# EAGLE board AD9833_FG_Main (EAGLE 7.2.0)

Size 159.69 x 80 mm. Coordinates in mm from the lower left corner, seen from the top.
Outline: 59.69,0 159.69,0 159.69,80 59.69,80 59.69,0
Copper layers (1*16): Top 0.035mm / dielectric 1.5mm / Bottom 0.035mm
Design rules "default": minimum track width 10mil, minimum drill 24mil, track to track 8mil, track to pad 8mil, pad to pad 8mil, via to via 8mil, smd to smd 8mil, copper to edge 40mil, drill to drill 8mil, minimum pad ring 10mil, minimum via ring 8mil, stop-mask expansion 4mil, vias tented up to drill 0mil, thermal gap 10mil

## Footprints (pad centres in the part's own frame; a part is rotated, then mirrored left to right if it is on the bottom)
C050-024X044 = drill 0.813 octagon: 1 -2.54,0; 2 2.54,0
C025-024X044 = drill 0.813 octagon: 1 -1.27,0; 2 1.27,0
SANYO-OSCON_C = drill 0.8 pad 1.27: + 1.25,0; - -1.25,0
E2,5-6 = drill 0.813 pad 1.6: + -1.27,0 | drill 0.813 pad 1.6 octagon: - 1.27,0
DIL28-3 = drill 0.813 long: 1 -15.24,-3.81; 2 -12.7,-3.81; 3 -10.16,-3.81; 4 -7.62,-3.81; 5 -5.08,-3.81; 6 -2.54,-3.81; 7 0,-3.81; 8 2.54,-3.81; 9 5.08,-3.81; 10 7.62,-3.81; 11 10.16,-3.81; 12 12.7,-3.81; 13 15.24,-3.81; 14 17.78,-3.81; 15 17.78,3.81; 16 15.24,3.81; 17 12.7,3.81; 18 10.16,3.81; 19 7.62,3.81; 20 5.08,3.81; 21 2.54,3.81; 22 0,3.81; 23 -2.54,3.81; 24 -5.08,3.81; 25 -7.62,3.81; 26 -10.16,3.81; 27 -12.7,3.81; 28 -15.24,3.81
AD9833_MODULE = drill 0.8: P$1 -10.16,-2.54; P$2 -7.62,-2.54; P$3 -5.08,-2.54; P$4 -2.54,-2.54; P$5 0,-2.54; P$6 2.54,-2.54; P$7 5.08,-2.54
TO220-4H = drill 1.118 long: 1 -3.81,-12.7; 2 -1.27,-12.7; 3 1.27,-12.7; 4 3.81,-12.7
TO226AA = drill 0.813 octagon: 1 -2.544,0; 2 0.001,0; 3 2.524,-0.04
1X03 = drill 1.016 long: 1 -2.54,0; 2 0,0; 3 2.54,0
1X02 = drill 1.016 long: 1 -1.27,0; 2 1.27,0
ATD_SPLC792-I2C = drill 0.8: P$1 -8.89,5.08; P$2 -6.35,5.08; P$3 -3.81,5.08; P$4 -1.27,5.08; P$5 1.27,5.08; P$6 3.81,5.08; P$7 6.35,5.08; P$8 8.89,5.08; P$9 11.43,5.08
LED3MM = drill 0.813 octagon: A -1.27,0; K 1.27,0
HC49/S = drill 0.813: 1 -2.413,0; 2 2.413,0
0207/7 = drill 0.813 octagon: 1 -3.81,0; 2 3.81,0
W237-132 = drill 1.194 long: 1 -2.54,-0.635; 2 2.54,-0.635

## Placement (x,y rotation side)
C1  22pF  [C050-024X044]  43.18,74.93 0 top
C2  22pF  [C050-024X044]  35.56,74.93 0 top
C3  0.1uF  [C025-024X044]  27.94,74.93 0 top
C4  0.1uF  [C025-024X044]  21.59,74.93 0 top
C5  100uF  [SANYO-OSCON_C]  -12.7,67.31 0 top  (outside the outline)
C6  10uF  [E2,5-6]  12.7,74.93 0 top
C7  0.1uF  [C025-024X044]  -35.56,-24.13 0 top  (outside the outline)
C8  0.1uF  [C025-024X044]  -35.56,-29.21 0 top  (outside the outline)
IC1  ATMEGA48/88/168  [DIL28-3]  26.67,57.15 0 top
IC2  AD9833_MODULE  [AD9833_MODULE]  17.78,35.56 0 top
IC3  NJM2396  [TO220-4H]  38.1,44.45 0 top
IC4  HT7330  [TO226AA]  -5.08,68.58 0 top
JP1  RE  [1X03]  41.91,67.31 0 top
JP2  SW  [1X02]  34.29,67.31 0 top
JP6  TP_GND  [1X02]  -11.43,54.61 0 top  (outside the outline)
LCD1  ATD_SPLC792-I2C  [ATD_SPLC792-I2C]  19.05,21.59 0 top
LED1  GREEN  [LED3MM]  -35.56,-12.7 0 top  (outside the outline)
Q1  16MHz  [HC49/S]  0,55.88 0 top
R1  1k  [0207/7]  3.81,73.66 0 top
R2  12k  [0207/7]  -6.35,73.66 0 top
R3  3.3k  [0207/7]  41.91,80.01 0 top
R4  6.8k  [0207/7]  31.75,80.01 0 top
R5  12k  [0207/7]  21.59,80.01 0 top
R6  1k  [0207/7]  -33.02,-3.81 0 top  (outside the outline)
R7  10k  [0207/7]  -33.02,-19.05 0 top  (outside the outline)
X1  OUT  [W237-132]  -21.59,7.62 0 top  (outside the outline)
X2  PWR  [W237-132]  -33.02,7.62 0 top  (outside the outline)

## Library data of the parts
C1-C8 R1-R7 = rcl
IC1-IC4 LCD1 = mylib2
JP1 JP2 JP6 = pinhead
LED1 = led
Q1 = crystal; OC_FARNELL: 1667008; OC_NEWARK: unknown
X1 X2 = con-wago-508; OC_FARNELL: unknown; OC_NEWARK: unknown

## Nets
+3V3: C6.+ IC4.3 LCD1.P$1
+5V: C4.1 C5.+ C7.2 C8.2 IC1.7 IC1.20 IC2.P$2 IC3.2 IC4.2 R1.2 R6.2 R7.2
GND: C1.1 C2.1 C3.2 C4.2 C5.- C6.- C7.1 C8.1 IC1.8 IC1.22 IC2.P$3 IC3.3 IC4.1 JP1.3 JP2.2 JP6.1 JP6.2 LCD1.P$4 LCD1.P$8 LED1.K R3.1 R5.1 X1.2 X2.2
N$1: IC1.17 IC2.P$4
N$2: IC1.19 IC2.P$5
N$3: IC1.16 IC2.P$6
N$4: IC1.28 LCD1.P$6
N$5: IC1.27 LCD1.P$5
N$6: IC2.P$7 X1.1
N$7: IC1.26 R4.2
N$8: IC1.4 JP1.1
N$9: IC1.5 JP1.2
N$10: IC1.6 JP2.1
N$11: C1.2 IC1.9 Q1.1
N$12: C2.2 IC1.10 Q1.2
N$13: LCD1.P$7 R4.1 R5.2
N$14: LCD1.P$9 R1.1
N$15: C3.1 IC3.1 IC3.4 R2.2 X2.1
N$16: IC1.23 R2.1 R3.2
N$17: LED1.A R6.1
N$18: IC1.1 R7.1

## Tracks (layer width: path | path; a pad name or v marks a point on that pad's centre or on a via)
+3V3  (2 unrouted)
+5V  (11 unrouted)
GND  (23 unrouted)
N$1  (1 unrouted)
N$2  (1 unrouted)
N$3  (1 unrouted)
N$4  (1 unrouted)
N$5  (1 unrouted)
N$6  (1 unrouted)
N$7  (1 unrouted)
N$8  (1 unrouted)
N$9  (1 unrouted)
N$10  (1 unrouted)
N$11  (2 unrouted)
N$12  (2 unrouted)
N$13  (2 unrouted)
N$14  (1 unrouted)
N$15  (4 unrouted)
N$16  (2 unrouted)
N$17  (1 unrouted)
N$18  (1 unrouted)